# Altium PCB analogParachuteController.PcbDoc
Units mil, origin at the board's own origin, x right, y up, seen from the top; angles counter-clockwise.
Board outline 6000 x 4000 mil, 2 copper layers (Top Layer, Bottom Layer); 14 components, 12 nets, 46 pads, 8 vias.
Unrouted connection lines stored in the file: 7.
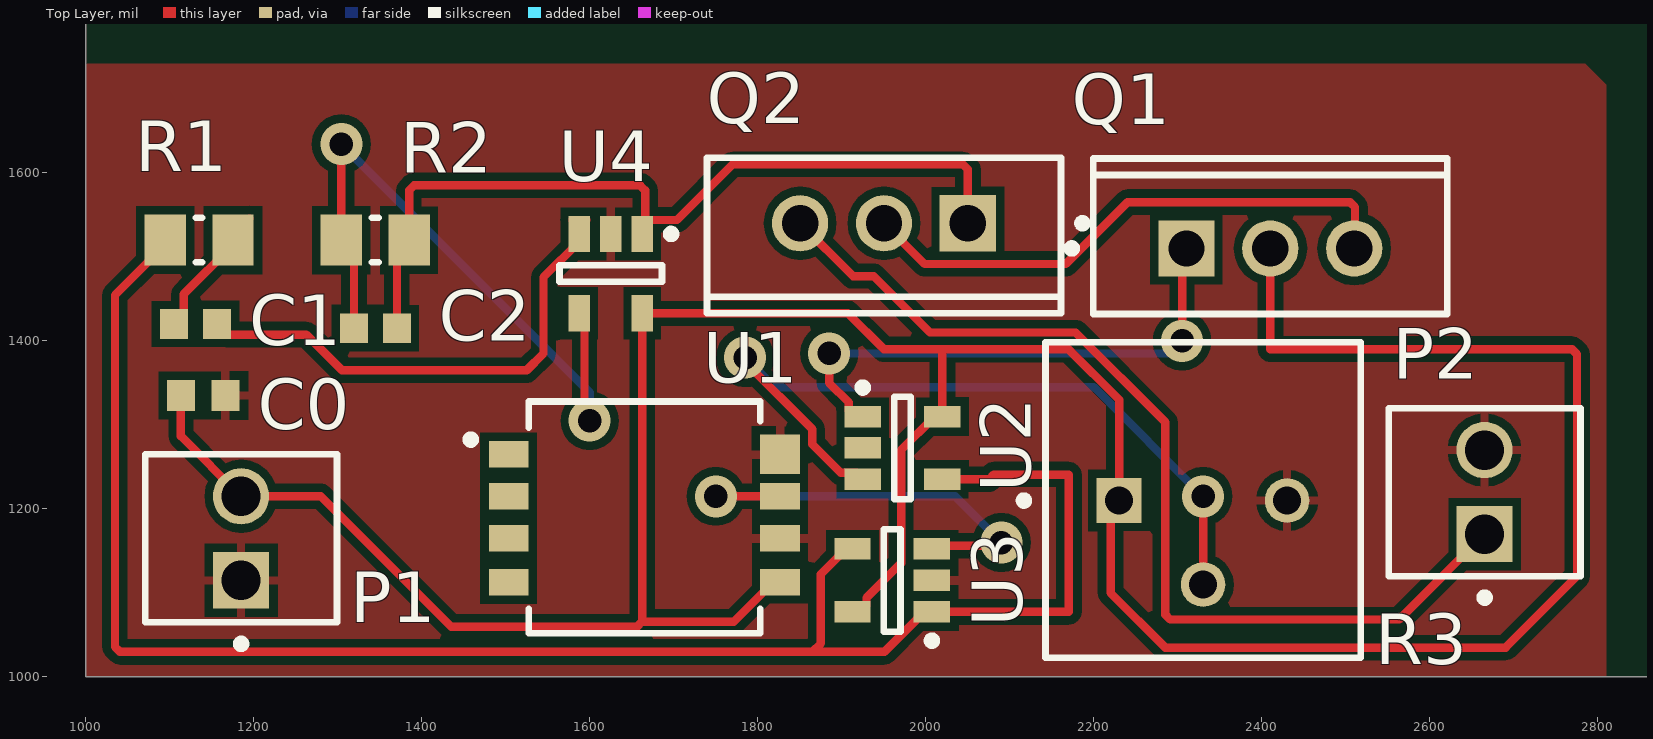
[diagram p0: Top Layer view]
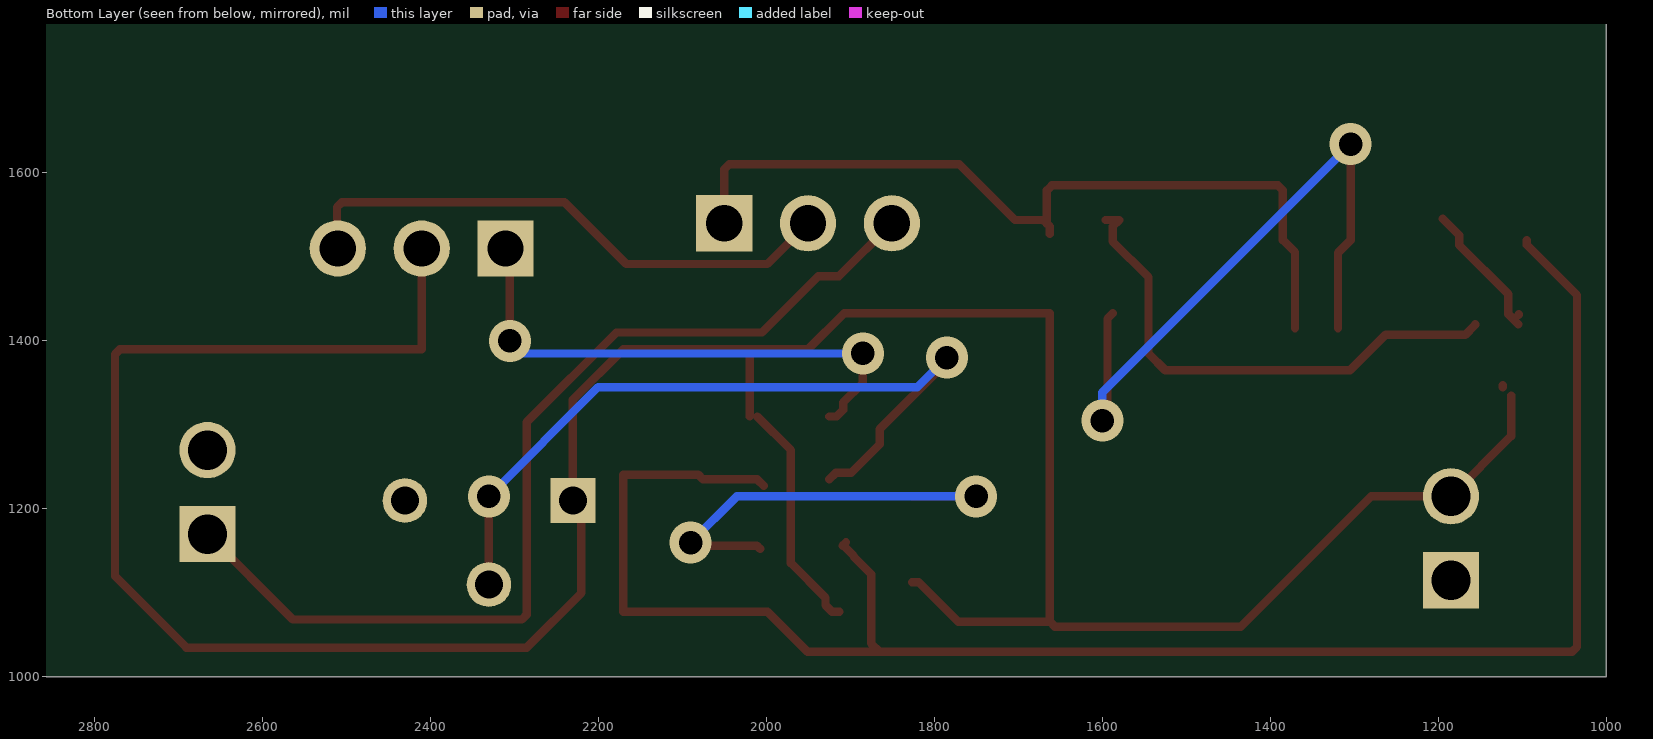
[diagram p1: Bottom Layer view, seen from below]

## Layer stack, top to bottom
Top Solder: solder mask 0.4, Solder Resist, Dk 3.5
Top Layer: signal copper 1.4
Dielectric 1: dielectric 12.6, FR-4, Dk 4.8
Bottom Layer: signal copper 1.4
Bottom Solder: solder mask 0.4, Solder Resist, Dk 3.5

## Board outline
1000,1000 7000,1000 7000,5000 1000,5000

## Design rules (kind name [scope] priority, off if disabled: settings)
Clearance [All] p1: gap=10 ignorepadtopadclearanceinfootprint=FALSE except(0: Arc-Hole Track-Hole SMDPad-Hole THPad-Hole Via-Hole Fill-Hole Poly-Hole Region-Hole Text-Hole)
PolygonConnect [All] p1: connectstyle=Relief reliefconductorwidth=10 reliefentries=4 polygonreliefangle="90 Angle" airgapwidth=10
RoutingVias [All] p1: holewidth=28 width=50 viastyle="Through Hole" minholewidth=28 minwidth=50 maxholewidth=28 maxwidth=50
SolderMaskExpansion [All] p1: expansion=4
Width [All] p1: maxlimit=10 minlimit=10 preferedwidth=10
30 further rules are at their usual default settings.

## Components (designator, comment, footprint, x,y, rotation, side; value= is the part's Value field where it differs from the comment)
C0 "10uF" CAPC1608X90X35NL10T15 1140,1335 r180 top (schematic designator C?)
C1 "1uF" CAPC1608X90X35LL15T15 1130.59,1420 r0 top (schematic designator C?)
C2 "1uF" CAPC1608X90X35LL15T15 1345,1415 r0 top (schematic designator C?)
P1 "22-27-2021" MOLX-22-27-2021_V 1185,1165 r90 top (schematic designator P?)
P2 "22-27-2021" MOLX-22-27-2021_V 2665,1220 r90 top (schematic designator P?)
Q1 "RFP50N06" FAIR-TO-220AB-3 2410,1510 r90 top (schematic designator Q?)
Q2 "RFP50N06" FAIR-TO-220AB-3 1950.2,1540 r270 top (schematic designator Q?)
R1 "100KR" RESC2013X50X30ML20T20 1135,1520 r0 top (schematic designator R?)
R2 "100KR" RESC2013X50X30ML20T20 1344.65,1520 r0 top (schematic designator R?)
R3 "3386P-1-104LF" BOUR-3386P 2330,1160 r0 top (schematic designator R?)
U1 "KP216H1416" INF-DSOF-8-16_V 1665,1190 r0 top (schematic designator U?)
U2 "MCP601T-E/OT" SOT-23-OT5_N 1972.24,1272.6 r0 top (schematic designator U?)
U3 "MCP601T-E/OT" SOT-23-OT5_N 1960,1115 r180 top (schematic designator U?)
U4 "MCP601T-E/OT" SOT-23-OT5_N 1625,1480 r270 top (schematic designator U?)

## Footprints (in the part's own frame and the unit in brackets; to place one, negate y for a bottom-side part, rotate by r counter-clockwise, add the part's x,y. Pads: shape width x height; smd on the part's side, far side on the other; paste and mask are expansions set on the pad)
BOUR-3386P [mm] "THD, 3-Leads, Body 9.53x9.53mm, Pitch 2.54mm"
  rect 1.35x1.35 hole 0.85: 1(-2.54,1.27)
  round 1.35 hole 0.85: 2(0,-1.27) 3(2.54,1.27)
  silkscreen extent -5.54,-3.48 4.76,6.05, body extent -4.79,-3.52 4.79,6.06, height 4.95
CAPC1608X90X35LL15T15 [mm] "Chip Capacitor, 2-Leads, Body 1.60x0.81mm, IPC High Density"
  rect 0.85x0.9 smd: 1(-0.65,0) 2(0.65,0)
  body extent -0.88,-0.48 0.87,0.48, height 0.9
CAPC1608X90X35NL10T15 [mm] "Chip Capacitor, 2-Leads, Body 1.60x0.80mm, IPC Medium Density"
  rect 0.85x0.95 smd: 1(-0.675,0) 2(0.675,0)
  body extent -0.85,-0.45 0.85,0.45, height 0.9
FAIR-TO-220AB-3 [mm] "FM, 3-Leads, Body 10.7x4.7mm, Pitch 2.535mm"
  rect 1.7x1.7 hole 1.1: 1(0,2.535)
  round 1.7 hole 1.1: 2(0,0) 3(0,-2.535)
  silkscreen extent -1.98,-5.35 2.72,6.12, body extent -1.98,-5.35 2.72,5.35, height 20.4
INF-DSOF-8-16_V [mm] "DSOF, 8-Leads, Body 7x7mm, Pitch 1.27mm"
  rect 1.2x0.8 smd: 1(-4.1,1.905) 2(-4.1,0.635) 3(-4.1,-0.635) 4(-4.1,-1.96) 5(4.1,-1.96) 6(4.1,-0.635) 7(4.1,0.635)
  rect 1.2x1.2 smd: 8(4.1,1.905)
  silkscreen extent -5.37,-3.5 3.5,3.5, body extent -3.5,-3.5 3.5,3.5, height 2.9
MOLX-22-27-2021_V [mm] "Header, 2-Leads, Body 5.8x5.08mm"
  rect 1.7x1.7 hole 1.19: 1(-1.27,0)
  round 1.7 hole 1.19: 2(1.27,0)
  silkscreen extent -3.31,-2.9 2.54,2.9, body extent -2.54,-2.9 2.54,2.9, height 11.72
RESC2013X50X30ML20T20 [mm] "Chip Resistor, 2-Leads, Body 2.00x1.25mm, IPC Low Density"
  rect 1.25x1.55 smd: 1(-1.025,0) 2(1.025,0)
  silkscreen extent -0.1,-0.67 0.1,0.67, body extent -1.1,-0.72 1.1,0.72, height 0.5
SOT-23-OT5_N [mm] "SOT23, 5-Leads, Body 2.9x1.7mm, Pitch 0.95mm, Lead Span 2.8mm, IPC Medium Density"
  rect 1.1x0.65 smd: 1(-1.2,0.95) 2(-1.2,0) 3(-1.2,-0.95) 4(1.2,-0.95) 5(1.2,0.95)
  silkscreen extent -1.32,-1.55 0.25,1.95, body extent -0.9,-1.55 0.9,1.55, height 1.45

## Part data
C0: library part CMP-2006-02792-1, Manufacturer=Murata, Part Number=GRM188R60J106ME47D
C1 C2: library part CMP-2006-04551-1, Manufacturer="AVX Interconnect / Elco", Part Number=0603ZC105KAT2A
P1 P2: library part CMP-2000-05537-1, "Male Header, Pitch 2.54 mm, 1 x 2 Position, Height 11.7 mm, Tail Length 3.56 mm, 0 to 75 degC, RoHS, Bulk", Current - Max=4A, Manufacturer=Molex, Operating temperature=0°Cto+75°C, Package Description="2-Leads Header, Body 5.08 x 5.8 mm, Pitch 2.54 mm", Package Version="Rev. BC, 02/2012", PartNumber=0022272021, Voltage - Max=250V, Contact material=Tinplatedbrass, Current rating=4A, Datasheet URL=http://www.molex.com/pdm_docs/sd/022272021_sd.pdf, Datasheet Version="Rev. F, 06/2009", Housing material=Nylon(UL94V-0), Manufacturer URL=http://www.molex.com/, Mounting Technology=ThroughHole, No. of Positions=2, No. of Rows=1, Orientation=Vertical, Package Reference=22-27-2021, Pitch=2.54mm, Voltage rating=250V
Q1 Q2: library part CMP-2000-06978-1, "N-Channel Power MOSFET, 60 V, 50 A, 22 mOhm, -55 to 175 degC, 3-Pin FM (TO-220AB), RoHS, Tube", Drain-Source On Resistance-Max=0.022O, Drain-to-Source Voltage [Vdss]=60V, Manufacturer="Fairchild Semiconductor", Package Description="3-Pin Through Hole Device, Body 10.16 x 4.35 mm, Pitch 2.535 mm", Package Reference=TO-220AB-3, Rated Power Dissipation=131W, Channel Type=N-Channel, Datasheet URL=https://www.fairchildsemi.com/datasheets/RF/RFP50N06.pdf, Datasheet Version="Rev. C0, 09/2013", Manufacturer URL=https://www.fairchildsemi.com/, Mounting Technology=ThroughHole, Package URL=https://www.fairchildsemi.com/package-drawings/TO/TO220B03.pdf, Qg Gate Charge=150nC
R1 R2: library part CMP-2001-04900-1, Manufacturer="Vishay Dale", Part Number=CRCW0805100KJNEA
R3: library part CMP-2000-05592-1, "Square Trimpot(R) Trimming Potentiometer, 100 KOhm, +/- 10%, 0.5 W, -55 to 125 degC, 3-Pin THD, RoHS, Tube", Manufacturer=Bourns, Manufacturer Series=3386, Maximum Operating Temperature=125C, Minimum Operating Temperature=-55C, Operating Temperature-Max (Cel)=125, Operating Temperature-Min (Cel)=-55, Package=RectangularPackage, Package Description="3-Pin Through Hole Device, Body 9.53 x 9.53 mm, Pitch 2.54 mm", Package Reference=3386P, Power Rating=1/2W, Rated Power Dissipation (P) (W)=0.5, Rated Temperature (Cel)=85, Resistance (ohm)=100000, Resistance Law=Linear, Resistance Value=100KOhm, Resistive Element Material=Cermet, Temperature Coefficient=100ppm/C, Tolerance=10%, Tolerance (%)=10, Actuator Orientation=Vertical, Actuator Type=Screw, Datasheet URL=http://www.bourns.com/docs/Product-Datasheets/3386.pdf, Datasheet Version=05/2016, Family=3386, Lead Free=NO, Manufacturer URL=http://www.bourns.com/, Mounting=ThroughHole, Mounting Feature=ThroughHole, Mounting Technology=ThroughHole, Number of Terminals=3, Number of Turns=1, Packaging=Tube, Product Depth=9.53mm, Product Height=4.83mm, Product Length=9.53mm, Product Type=Potentiometer, Shaft Diameter=3.15mm, Technology=Cermet, Terminal Finish=TINLEAD, Terminal Shape=WIRE, Termination Style=Pin, Type=Trimmer
U1: library part CMP-1087-00008-1, "Analog Absolute Pressure Sensor, -40 to 140 degC, DSOF-8-16, Reel, Green", Manufacturer=Infineon, Supply Voltage="5 V", ComponentLink1Description="Manufacturer URL", ComponentLink1URL=http://www.infineon.com/, ComponentLink2Description=Datasheet, ComponentLink2URL=http://www.infineon.com/dgdl/KP216H1416_DS_Rev_+1.1.pdf?folderId=db3a30431d8a6b3c011dd8fc5a954267&fileId=db3a30432ad629a6012af6b321c40b4a, ComponentLink3Description="Package Specification", ComponentLink3URL=http://www.infineon.com/dgdl/KP234_DS_Rev_1.0.pdf?folderId=db3a30431d8a6b3c011dd8fc5a954267&fileId=db3a30432ad629a6012af66bbf030b08, DatasheetVersion="Rev. 1.1", Green=TRUE, Halogen-free=TRUE, Mounting Technology="Surface Mount", PackageDescription="8-Pin Plastic (Green) Dual Small Outline Flat Package, 7 x 7 mm Body, 1.27 mm Pitch", PackageReference=DSOF-8-16, PackageVersion=Jun-10, Packing=Reel, PartNumber=KP216H1416, Pressure Range [kPa]="50 - 150", RevisionNote="Lost Devices pt2"
U2 U3 U4: library part CMP-0187-00431-2, "2.7V to 6.0V Single Supply CMOS Operational Amplifier, 5-Pin SOT-23, Extended Temperature, Tape and Reel", Code_IPC=SOT23-5, ComponentLink1Description="Manufacturer URL", ComponentLink1URL=http://www.microchip.com/, ComponentLink2Description=Datasheet, ComponentLink2URL=http://ww1.microchip.com/downloads/en/DeviceDoc/21314g.pdf, ComponentLink3Description="Package Specification", ComponentLink3URL=http://www.microchip.com/stellent/groups/techpub_sg/documents/packagingspec/en012702.pdf, DatasheetVersion="revG, Dec-2007", PackageDescription="5-Lead Plastic Small Outline Transistor (OT) [SOT-23]", PackageReference=SOT-23-OT5, PackageVersion="revBB, Aug-2009", RevisionNote="URLs added."

## Via types
v1: diameter 50, hole 28, Top Layer to Bottom Layer, 8 vias

## Nets (pads, with @x,y where several pads share a name; then routed paths per layer and width w, separated by ;. In a path a pad name is that pad's centre, name@x,y a point inside that pad or via, vN(x,y) a via of type N, cw(c..) or ccw(c..) an arc to the next point about the centre after c; other vN are vias at no path point)
+5: C0.2 P1.2 Q1.2 R3.1 U1.5 U2.5 U3.5 U4.5 | length 3817.1
  Top Layer w10: C0.2 1113.43,1286.57 P1.2 1280,1215 1435,1060 1656.54,1060 1662.4,1065.86 ; C0.2@1123.43,1345 C0.2@1123.43,1346.97 ; U1.5 1818.54,1112.82 1771.59,1065.86 1662.4,1065.86 ; U3.5 1921.61,1077.6 1929.41,1085.39 1929.41,1094.25 1970.59,1135.43 1970.59,1269.96 U2.5@2010.63,1310 ; U2.5 2019.49,1390 ; Q1.2 2410,1390 2769.14,1390 2775,1384.14 2775,1120 2690,1035 2285,1035 2220,1100 2220,1200 R3.1 2230,1330 2170,1390 2019.49,1390 ; 1662.4,1065.86 U4.5 1907.24,1432.76 1950,1390 2019.49,1390
GND: C0.1 P1.1 P2.2 R3.3 U1.6 U1.8 U2.2 U3.2 U4.2
NetC1_1: C1.1 R1.2 | length 163.8
  Top Layer w10: C1.1@1104.13,1430.87 C1.1@1104.13,1431.85 ; C1.1 1116.73,1431.73 1116.73,1455.47 1175.35,1514.09 R1.2 1175.35,1525.91 R1.2@1194.96,1545.51
NetC1_2: C1.2 U4.3 | length 616.5
  Top Layer w10: C1.2 1156.18,1419.02 1167.91,1407.28 1262.82,1407.28 1305.1,1365 1525,1365 1545,1385 1545,1475.79 1587.6,1518.39 U4.3 1587.6,1536.1 1579.8,1543.9 U4.3@1596.1,1543.9
NetC2_1: C2.1 R2.1 U4.4 | length 818.3
  Top Layer w10: v1@1310,1640 v1(1304.29,1634.29) R2.1 1319.41,1504.88 C2.1 ; U4.4 1593.8,1426.56 1593.8,1311.2 v1(1600,1305)
  Bottom Layer w10: v1(1304.29,1634.29) 1600,1338.58 v1(1600,1305)
NetC2_2: C2.2 Q2.1 R2.2 U4.1 | length 989
  Top Layer w10: C2.2 1370.59,1505.59 R2.2 1385,1579.14 1390.86,1585 1660,1585 1665.86,1579.14 U4.1@1665.86,1539.56 ; U4.1 1662.4,1536.1 U4.1@1665.86,1539.56 ; Q2.1 2050,1604.14 2044.14,1610 1770,1610 1703.9,1543.9 1670.2,1543.9 U4.1@1665.86,1539.56
NetP?_1: P2.1 Q2.3 | length 1186.2
  Top Layer w10: Q2.3 1913.34,1477.05 1937.95,1477.05 2005,1410 2178.28,1410 2285,1303.28 2285,1074.28 2290.86,1068.43 2563.43,1068.43 P2.1
NetQ1_1: Q1.1 U2.1 | length 635.1
  Top Layer w10: v1(1885,1385) 1885,1350 1908.35,1326.65 1908.35,1317.8 1916.14,1310 U2.1 ; v1(2305,1400) 2305,1504.8 Q1.1
  Bottom Layer w10: v1(1885,1385) 2290,1385 v1(2305,1400)
NetQ1_3: Q1.3 Q2.2 | length 663.2
  Top Layer w10: Q2.2 1998.66,1491.54 2166.54,1491.54 2240,1565 2505,1565 2510.86,1559.14 2510.86,1511.05 Q1.3
NetR1_1: R1.1 U2.4 U3.1 U3.4 | length 2152.6
  Top Layer w10: R1.1 1094.65,1514.09 1035,1454.45 1035,1035.86 1040.86,1030 1865,1030 ; U3.4@1905,1160.16 1908.88,1156.28 1907.78,1156.28 1896.1,1144.61 1896.1,1143.5 1875,1122.4 1875,1040 1865,1030 ; U2.4@2002.83,1227.4 2010.63,1235.2 U2.4 2075.2,1235.2 2080.86,1240.86 2170,1240.86 2170,1077.6 U3.1 1998.39,1077.6 1950.79,1030 1865,1030
NetR?_2: R3.2 U2.3 | length 931.8
  Top Layer w10: v1(1785,1380) 1785,1374.87 1865.04,1294.84 1865.04,1276.9 1898.94,1242.99 1917.2,1242.99 U2.3 ; R3.2 v1(2330,1215)
  Bottom Layer w10: v1(1785,1380) 1820,1345 2200,1345 v1(2330,1215)
NetU1_7: U1.7 U3.3 | length 525.1
  Top Layer w10: v1(1750,1215) U1.7 ; U3.3 2011.04,1156.2 2086.2,1156.2 v1(2090,1160)
  Bottom Layer w10: v1(1750,1215) 2035,1215 v1(2090,1160)
pads on no net: U1.1 U1.2 U1.3 U1.4

## Polygon pours and split planes (outlines as drawn)
GND on Top Layer (solid, pour order 2): 1000,1000 2810,1000 2810,1705 2785,1730 1000,1730
no net on Top Layer "Top Layer-No Net" (solid, pour order 0): 2130,1815